# Altium PCB VRef_LP3878_MEZ_0603.PcbDoc
Units mm, origin at the board's own origin, x right, y up, seen from the top; angles counter-clockwise.
Board outline 56 x 38 mm, 2 copper layers (Top Layer, Bottom Layer); 49 components, 25 nets, 162 pads, 36 vias.
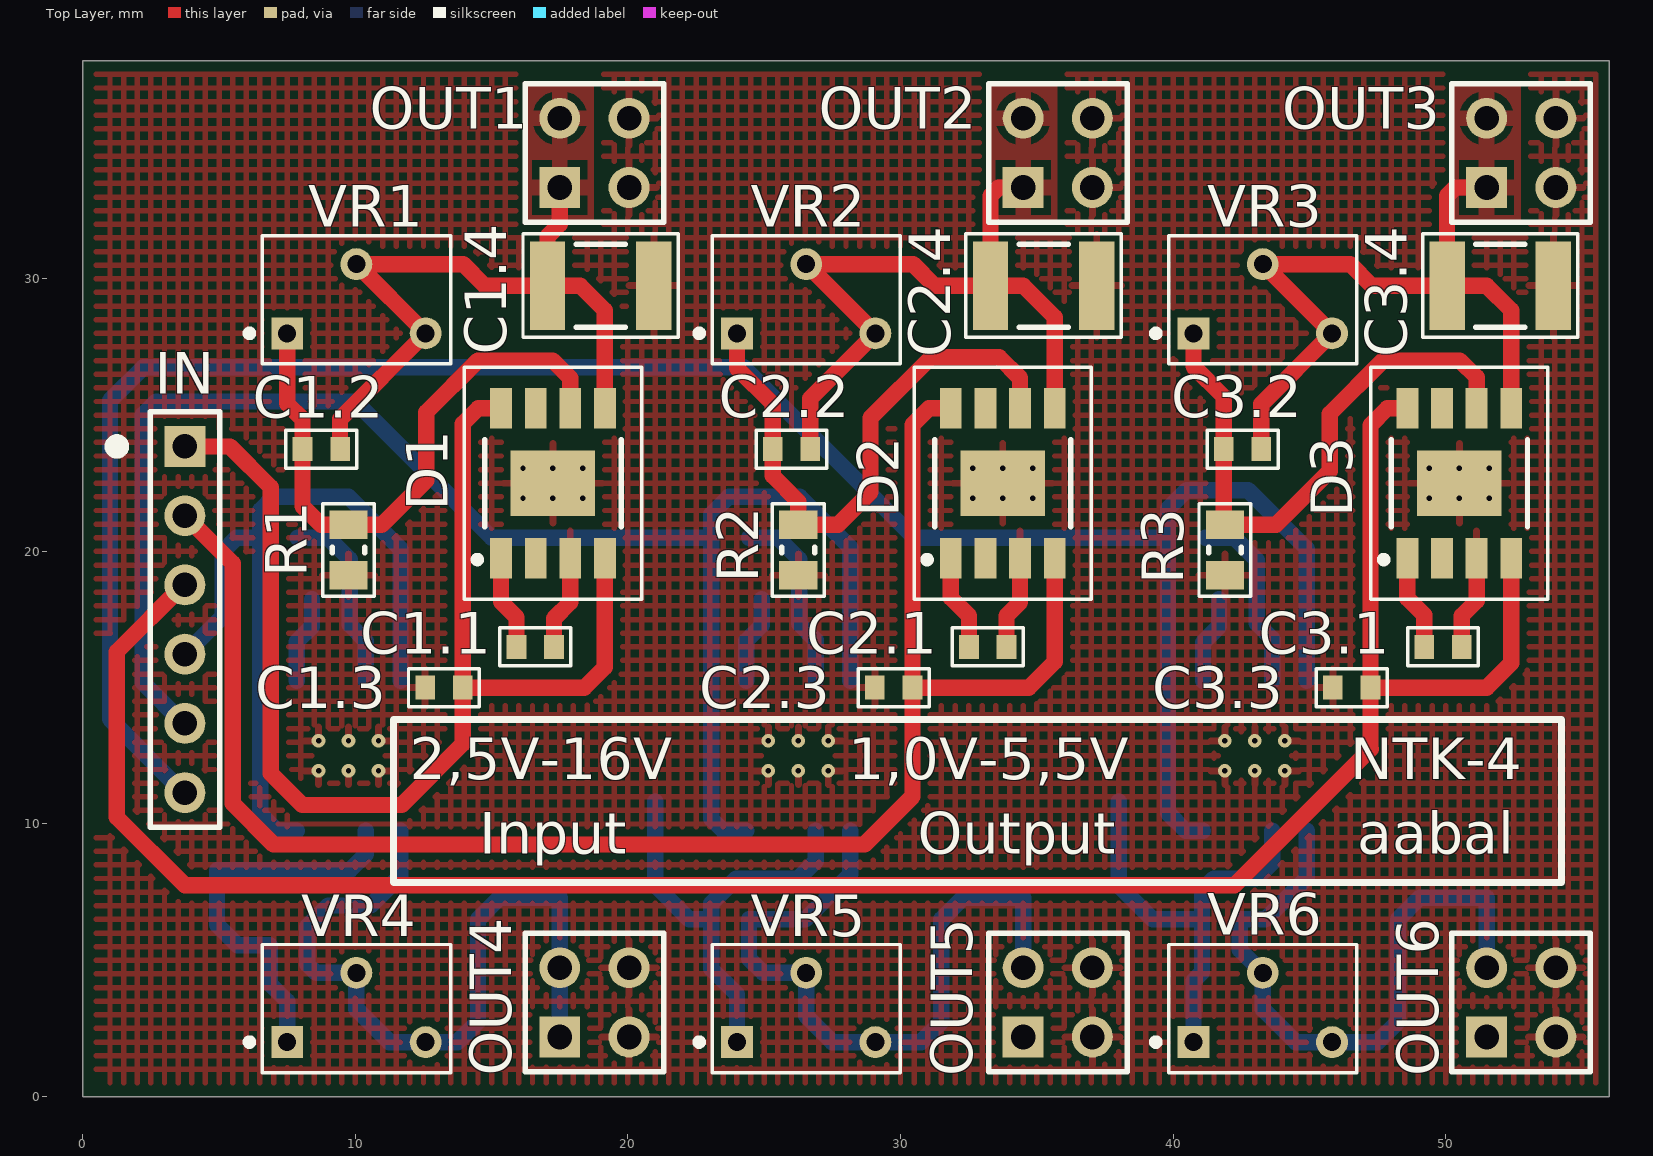
[diagram p0: Top Layer view]
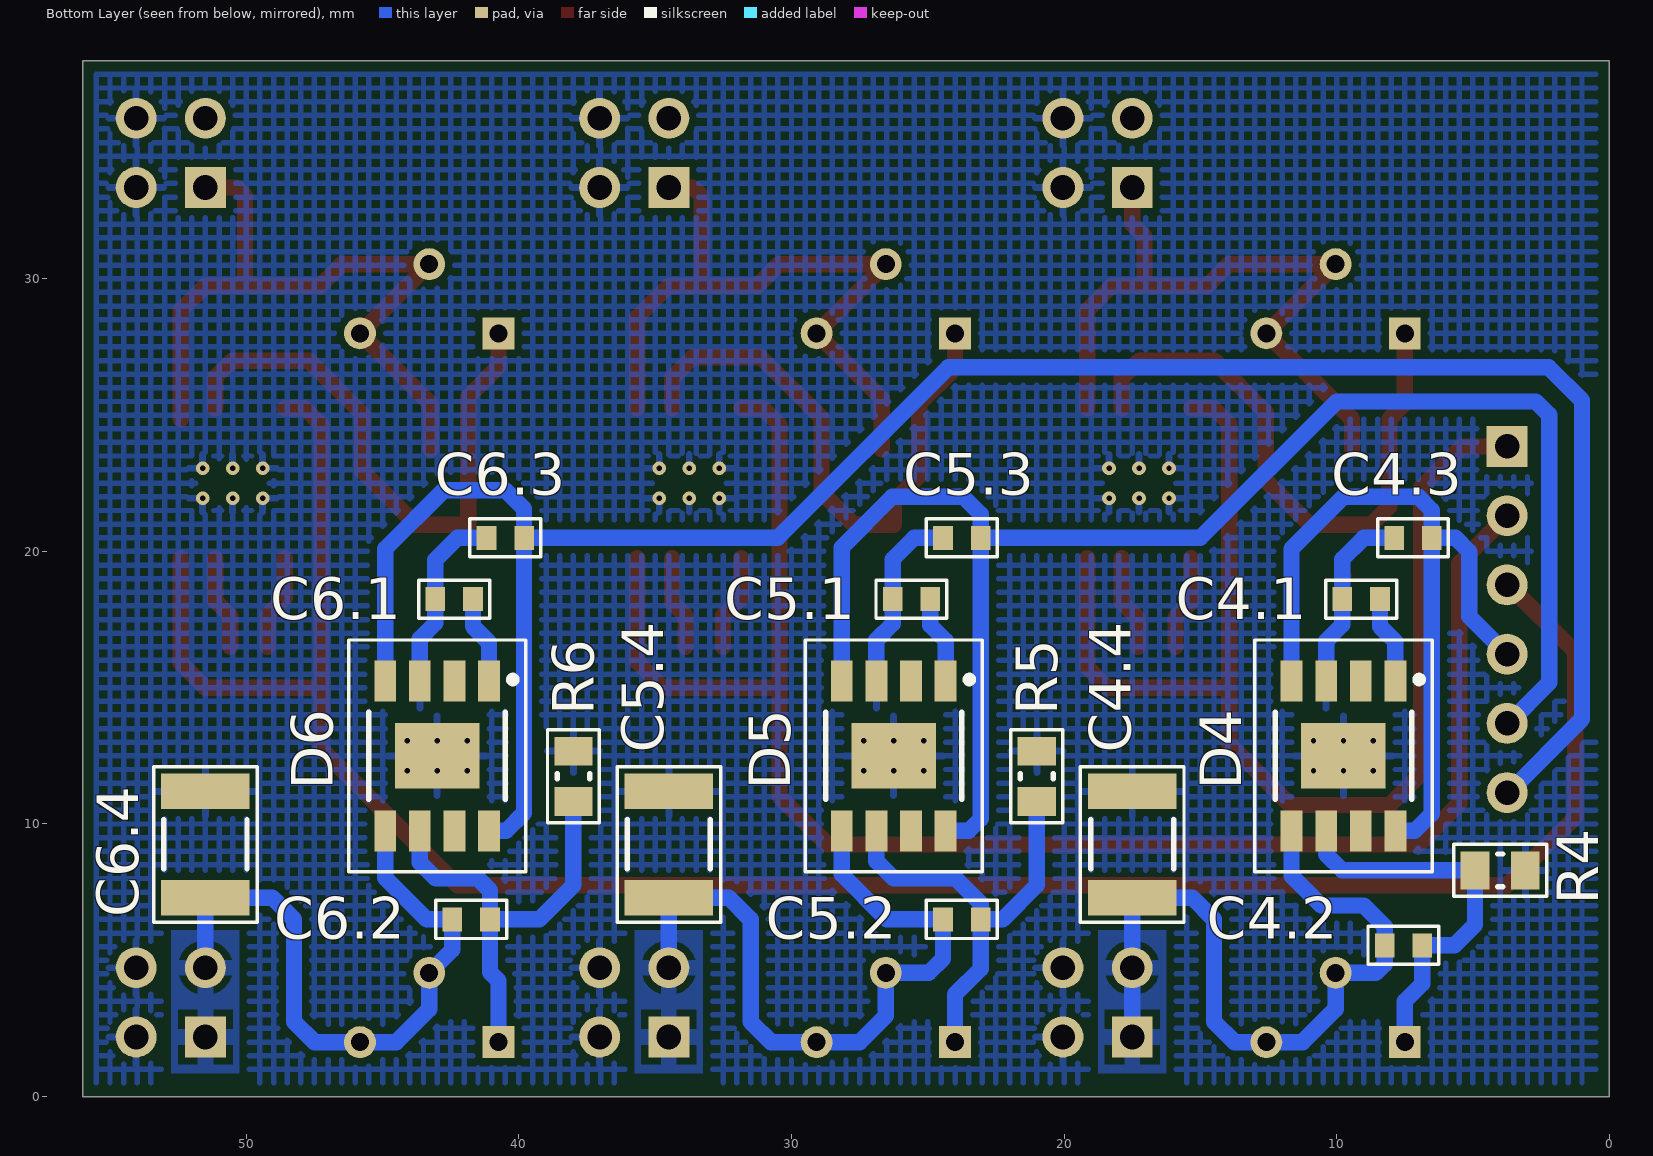
[diagram p1: Bottom Layer view, seen from below]

## Layer stack, top to bottom
Top Solder: solder mask 0.0102, Solder Resist, Dk 3.5
Top Layer: signal copper 0.0356
Dielectric 1: dielectric 0.32, FR-4, Dk 4.8
Bottom Layer: signal copper 0.0356
Bottom Solder: solder mask 0.0102, Solder Resist, Dk 3.5

## Board outline
0,0 56,0 56,38 0,38

## Design rules (kind name [scope] priority, off if disabled: settings)
Clearance [All] p1: gap=0.254 ignorepadtopadclearanceinfootprint=FALSE except(0: Arc-Hole Track-Hole SMDPad-Hole THPad-Hole Via-Hole Fill-Hole Poly-Hole Region-Hole Text-Hole)
PolygonConnect [All] p1: connectstyle=Relief reliefconductorwidth=0.254 reliefentries=4 polygonreliefangle="90 Angle" airgapwidth=0.254
RoutingVias [All] p1: holewidth=0.711 width=1.27 viastyle="Through Hole" minholewidth=0.711 minwidth=1.27 maxholewidth=0.711 maxwidth=1.27
SolderMaskExpansion [All] p1: expansion=0.102
Width [All] p1: maxlimit=0.6 minlimit=0.254 preferedwidth=0.254
30 further rules are at their usual default settings.

## Components (designator, comment, footprint, x,y, rotation, side; value= is the part's Value field where it differs from the comment)
C1.1 "0,01uF" CAP_0603 16.6,16.5 r0 top
C1.2 "C_FF" CAP_0603 8.75,23.75 r180 top
C1.3 "4,7uF" CAP_0603 13.25,15 r0 top
C1.4 "10uF" CAP_1812 19,29.75 r0 top
C2.1 "0,01uF" CAP_0603 33.2,16.5 r0 top
C2.2 "C_FF" CAP_0603 26,23.75 r180 top
C2.3 "4,7uF" CAP_0603 29.75,15 r0 top
C2.4 "10uF" CAP_1812 35.25,29.75 r0 top
C3.1 "0,01uF" CAP_0603 49.9,16.5 r0 top
C3.2 "C_FF" CAP_0603 42.55,23.75 r180 top
C3.3 "4,7uF" CAP_0603 46.55,15 r0 top
C3.4 "10uF" CAP_1812 52,29.75 r0 top
C4.1 "0,01uF" CAP_0603 9.1,18.25 r0 bottom
C4.2 "C_FF" CAP_0603 7.55,5.55 r180 bottom
C4.3 "4,7uF" CAP_0603 7.2,20.5 r180 bottom
C4.4 "10uF" CAP_1812 17.5,9.25 r90 bottom
C5.1 "0,01uF" CAP_0603 25.6,18.25 r0 bottom
C5.2 "C_FF" CAP_0603 23.75,6.5 r180 bottom
C5.3 "4,7uF" CAP_0603 23.75,20.5 r180 bottom
C5.4 "10uF" CAP_1812 34.5,9.25 r90 bottom
C6.1 "0,01uF" CAP_0603 42.375,18.25 r0 bottom
C6.2 "C_FF" CAP_0603 41.75,6.5 r180 bottom
C6.3 "4,7uF" CAP_0603 40.5,20.5 r180 bottom
C6.4 "10uF" CAP_1812 51.5,9.25 r90 bottom
D1 "LP3878MR-ADJ/NOPB" LP3878MR-ADJ/NOPB 17.25,22.5 r90 top
D2 "LP3878MR-ADJ/NOPB" LP3878MR-ADJ/NOPB 33.75,22.5 r90 top
D3 "LP3878MR-ADJ/NOPB" LP3878MR-ADJ/NOPB 50.5,22.5 r90 top
D4 "LP3878MR-ADJ/NOPB" LP3878MR-ADJ/NOPB 9.75,12.5 r270 bottom
D5 "LP3878MR-ADJ/NOPB" LP3878MR-ADJ/NOPB 26.25,12.5 r270 bottom
D6 "LP3878MR-ADJ/NOPB" LP3878MR-ADJ/NOPB 43,12.5 r270 bottom
IN "Header 6" HDR1X6 3.75,23.85 r270 top
OUT1 "Header 2X2" HDR2X2 17.5,33.35 r0 top
OUT2 "Header 2X2" HDR2X2 34.5,33.35 r0 top
OUT3 "Header 2X2" HDR2X2 51.5,33.35 r0 top
OUT4 "Header 2X2" HDR2X2 17.5,2.187 r0 top
OUT5 "Header 2X2" HDR2X2 34.5,2.187 r0 top
OUT6 "Header 2X2" HDR2X2 51.5,2.187 r0 top
R1 "RES" RES_0805 9.75,20.05 r90 top
R2 "RES" RES_0805 26.25,20.05 r90 top
R3 "RES" RES_0805 41.9,20.05 r90 top
R4 "RES" RES_0805 4,8.3 r0 bottom
R5 "RES" RES_0805 21,11.75 r270 bottom
R6 "RES" RES_0805 38,11.75 r270 bottom
VR1 "RES 3266W" "RES 3266W" 7.5,28 r0 top
VR2 "RES 3266W" "RES 3266W" 24,28 r0 top
VR3 "RES 3266W" "RES 3266W" 40.75,28 r0 top
VR4 "RES 3266W" "RES 3266W" 7.5,2 r0 top
VR5 "RES 3266W" "RES 3266W" 24,2 r0 top
VR6 "RES 3266W" "RES 3266W" 40.75,2 r0 top

## Footprints (in the part's own frame and the unit in brackets; to place one, negate y for a bottom-side part, rotate by r counter-clockwise, add the part's x,y. Pads: shape width x height; smd on the part's side, far side on the other; paste and mask are expansions set on the pad)
CAP_0603 [mm]
  rect 0.72x0.88 smd: 1(-0.69,0) 2(0.69,0)
  silkscreen extent -1.3,-0.7 1.3,0.7, body extent -0.8,-0.4 0.8,0.4, height 0.9
CAP_1812 [mm]
  rect 1.3x3.25 smd: 1(-1.95,0) 2(1.95,0)
  silkscreen extent -2.85,-1.9 2.85,1.9, body extent -2.25,-1.6 2.25,1.6, height 2
HDR1X6 [mm] "Connector; Header; 6 Position"
  rect 1.5x1.5 hole 0.9: 1(0,0)
  round 1.5 hole 0.9: 2(2.54,0) 3(5.08,0) 4(7.62,0) 5(10.16,0) 6(12.7,0)
  silkscreen extent -1.27,-1.27 13.97,1.27
HDR2X2 [mm] "Connector; Header; 2x2 Position"
  rect 1.5x1.5 hole 0.9: 1(0,0)
  round 1.5 hole 0.9: 2(0,2.54) 3(2.54,0) 4(2.54,2.54)
  silkscreen extent -1.27,-1.27 3.81,3.81
LP3878MR-ADJ/NOPB [mm] "SOIC, 8-Leads, Body 4,90x3,90mm, Pitch 1,27mm, Thermal Pad 3,10x2,41mm, IPC Medium Density"
  rect 1.5x0.8 smd: 1(-2.75,1.905) 2(-2.75,0.635) 3(-2.75,-0.635) 4(-2.75,-1.905) 5(2.75,-1.905) 6(2.75,-0.635) 7(2.75,0.635) 8(2.75,1.905)
  rect 2.41x3.1 smd: 9(0,0)
  silkscreen extent -4.25,-3.25 4.25,3.25, body extent -2,-2.5 2,2.5, height 1.68
"RES 3266W" [mm]
  rect 1.168x1.168 hole 0.66: 1(0,0)
  round 1.168 hole 0.66: 2(2.54,2.54) 3(5.08,0)
  silkscreen extent -1.48,-1.12 5.99,3.58, body extent -0.81,-1.02 5.9,3.48, height 8.77
RES_0805 [mm]
  rect 1.05x1.4 smd: 1(-0.925,0) 2(0.925,0)
  silkscreen extent -1.7,-0.95 1.7,0.95, body extent -1.1,-0.7 1.1,0.7, height 1

## Part data
C1.1 C1.2 C1.3 C1.4 C2.1 C2.2 C2.3 C2.4 C3.1 C3.2 C3.3 C3.4 C4.1 C4.2 C4.3 C4.4 C5.1 C5.2 C5.3 C5.4 C6.1 C6.2 C6.3 C6.4: library part CAP
IN: "Header, 6-Pin", LatestRevisionDate=17-Jul-2002, LatestRevisionNote="Re-released for DXP Platform.", Publisher="Altium Limited"
OUT1 OUT2 OUT3 OUT4 OUT5 OUT6: "Header, 2-Pin, Dual row", LatestRevisionDate=17-Jul-2002, LatestRevisionNote="Re-released for DXP Platform.", Publisher="Altium Limited"

## Via types
v1: diameter 0.5, hole 0.2, Top Layer to Bottom Layer, 36 vias

## Nets (pads, with @x,y where several pads share a name; then routed paths per layer and width w, separated by ;. In a path a pad name is that pad's centre, name@x,y a point inside that pad or via, vN(x,y) a via of type N, cw(c..) or ccw(c..) an arc to the next point about the centre after c; other vN are vias at no path point)
GND: C1.1.2 C1.3.1 C1.4.2 C2.1.2 C2.3.1 C2.4.2 C3.1.2 C3.3.1 C3.4.2 C4.1.2 C4.3.1 C4.4.2 C5.1.2 C5.3.1 C5.4.2 C6.1.2 C6.3.1 C6.4.2 D1.3 D1.9 D2.3 D2.9 D3.3 D3.9 D4.3 D4.9 D5.3 D5.9 D6.3 D6.9 OUT1.3 OUT1.4 OUT2.3 OUT2.4 OUT3.3 OUT3.4 OUT4.3 OUT4.4 OUT5.3 OUT5.4 OUT6.3 OUT6.4 R1.1 R2.1 R3.1 R4.1 R5.1 R6.1 | length 31.1
  Top Layer w0.6: C1.1.2 17.29,17.54 17.885,18.135 D1.3 ; C2.1.2 33.89,17.64 34.385,18.135 D2.3 ; C3.1.2 50.59,17.645 51.135,18.19 D3.3
  Bottom Layer w0.6: C4.3.1 9,20.5 9.79,19.71 C4.1.2 9.79,17.31 10.385,16.715 D4.3 ; C5.3.1 25.5,20.5 26.29,19.71 C5.1.2 26.29,17.346 26.885,16.751 D5.3 ; C6.3.1 42.25,20.5 43.065,19.685 C6.1.2 43.065,17.36 43.635,16.79 D6.3
  other v1: 8.65,11.95 9.75,11.95 10.85,11.95 25.15,11.95 26.25,11.95 27.35,11.95 41.9,11.95 43,11.95 44.1,11.95 8.65,13.05 9.75,13.05 10.85,13.05 25.15,13.05 26.25,13.05 27.35,13.05 41.9,13.05 43,13.05 44.1,13.05 16.15,21.95 17.25,21.95 18.35,21.95 32.65,21.95 33.75,21.95 34.85,21.95 49.4,21.95 50.5,21.95 51.6,21.95 16.15,23.05 17.25,23.05 18.35,23.05 32.65,23.05 33.75,23.05 34.85,23.05 49.4,23.05 50.5,23.05 51.6,23.05
IN1: C1.3.2 D1.4 D1.8 IN.1 | length 45.7
  Top Layer w0.6: IN.1@3.7,23.85 IN.1 5.4,23.85 6.9,22.35 6.9,11.85 8.052,10.698 11.698,10.698 13.94,12.94 C1.3.2 ; D1.8 14.507,25.25 13.94,24.683 C1.3.2 ; D1.4 19.155,15.755 18.4,15 C1.3.2
IN2: C2.3.2 D2.4 D2.8 IN.2 | length 62.3
  Top Layer w0.6: IN.2 5.5,19.56 5.5,10.75 7,9.25 28.682,9.25 30.44,11.008 C2.3.2 ; D2.8 31.042,25.25 30.44,24.647 C2.3.2 ; D2.4 35.655,15.955 34.7,15 C2.3.2
IN3: C3.3.2 D3.4 D3.8 IN.3 | length 81.5
  Top Layer w0.6: IN.3@3.7,18.77 1.25,16.32 1.25,10.25 3.75,7.75 42.25,7.75 47.25,12.75 47.24,12.76 C3.3.2 ; D3.8 47.857,25.25 47.24,24.633 C3.3.2 ; D3.4 52.405,15.905 51.5,15 C3.3.2
IN4: C4.3.2 D4.4 D4.8 IN.4 | length 29.6
  Bottom Layer w0.6: IN.4 5.131,17.611 5.131,19.988 5.642,20.5 C4.3.2 ; D4.8 7.139,9.75 6.51,10.38 C4.3.2 ; D4.4 11.655,20.095 9.75,22 7,22 6.51,21.51 C4.3.2
IN5: C5.3.2 D5.4 D5.8 IN.5 | length 58.8
  Bottom Layer w0.6: IN.5 3.7,13.69 2.2,15.19 2.2,25.008 2.692,25.5 10,25.5 15,20.5 C5.3.2 ; D5.8 23.5,9.75 23.06,10.19 C5.3.2 ; D5.4 28.155,20.145 26.3,22 23.7,22 23.06,21.36 C5.3.2
IN6: C6.3.2 D6.4 D6.8 IN.6 | length 81.2
  Bottom Layer w0.6: IN.6@3.7,11.15 1,13.85 1,25.535 2.215,26.75 24.25,26.75 30.5,20.5 C6.3.2 ; D6.8 40.464,9.75 39.81,10.404 C6.3.2 ; D6.4 44.905,20.095 42.75,22.25 40.5,22.25 39.81,21.56 C6.3.2
NetC1.1_1: C1.1.1 D1.1 | length 3.5
  Top Layer w0.6: D1.1 15.345,18.155 15.91,17.59 C1.1.1
NetC1.2_2: C1.2.2 D1.6 R1.2 VR1.1 | length 22
  Top Layer w0.6: VR1.1 7.5,25.417 8.06,24.857 C1.2.2 8.06,21.657 8.742,20.975 R1.2 10.975,20.975 12.6,22.6 12.6,25.1 14.5,27 17.245,27 17.885,26.36 D1.6
NetC2.1_1: C2.1.1 D2.1 | length 3.5
  Top Layer w0.6: D2.1 31.845,18.305 32.51,17.64 C2.1.1
NetC2.2_2: C2.2.2 D2.6 R2.2 VR2.1 | length 21.7
  Top Layer w0.6: VR2.1 24,26.722 25.31,25.413 C2.2.2 25.31,22.771 26.25,21.831 R2.2 27.707,20.975 28.9,22.168 28.9,24.9 31.126,27.126 33.624,27.126 34.385,26.365 D2.6
NetC3.1_1: C3.1.1 D3.1 | length 3.5
  Top Layer w0.6: D3.1 48.595,18.28 49.21,17.665 C3.1.1
NetC3.2_2: C3.2.2 D3.6 R3.2 VR3.1 | length 21.9
  Top Layer w0.6: VR3.1 40.75,26.787 41.86,25.677 C3.2.2 41.86,21.015 R3.2 43.775,20.975 45.75,22.95 45.75,25.05 47.7,27 50.519,27 51.135,26.384 D3.6
NetC4.1_1: C4.1.1 D4.1 | length 3.2
  Bottom Layer w0.6: D4.1 7.845,16.683 8.41,17.248 C4.1.1
NetC4.2_2: C4.2.2 D4.6 R4.2 VR4.1 | length 14.6
  Bottom Layer w0.6: VR4.1 7.5,3.5 6.86,4.14 C4.2.2 5.675,5.55 4.925,6.3 R4.2 9.8,8.3 10.385,8.885 D4.6
NetC5.1_1: C5.1.1 D5.1 | length 3.2
  Bottom Layer w0.6: D5.1 24.345,16.724 24.91,17.289 C5.1.1
NetC5.2_2: C5.2.2 D5.6 R5.2 VR5.1 | length 16.7
  Bottom Layer w0.6: R5.2 21,7.75 22.25,6.5 C5.2.2 ; VR5.1 24,3.75 23.06,4.69 C5.2.2 ; D5.6 26.885,8.635 26.25,8 23.978,8 23.06,7.082 C5.2.2
NetC6.1_1: C6.1.1 D6.1 | length 3.2
  Bottom Layer w0.6: D6.1 41.095,16.659 41.685,17.249 C6.1.1
NetC6.2_2: C6.2.2 D6.6 R6.2 VR6.1 | length 16.5
  Bottom Layer w0.6: R6.2 38,7.75 39.25,6.5 C6.2.2 ; VR6.1 40.75,4.25 41.06,4.56 C6.2.2 ; D6.6 43.635,8.585 43.05,8 41.5,8 41.06,7.56 C6.2.2
OUT1: C1.2.1 C1.4.1 D1.5 OUT1.1 OUT1.2 VR1.2 VR1.3 | length 26.3
  Top Layer w0.6: C1.2.1 9.44,24.86 VR1.3 VR1.2 13.96,30.54 14.75,29.75 C1.4.1 ; OUT1.1 17.5,32 17.05,31.55 C1.4.1 ; D1.5 19.155,28.85 18.255,29.75 C1.4.1
OUT2: C2.2.1 C2.4.1 D2.5 OUT2.1 OUT2.2 VR2.2 VR2.3 | length 26.7
  Top Layer w0.6: C2.2.1 26.69,25.61 VR2.3 VR2.2 30.46,30.54 31.25,29.75 C2.4.1 ; OUT2.1 33.6,33.35 33.3,33.05 C2.4.1 ; D2.5 35.655,28.595 34.5,29.75 C2.4.1
OUT3: C3.2.1 C3.4.1 D3.5 OUT3.1 OUT3.2 VR3.2 VR3.3 | length 27.6
  Top Layer w0.6: C3.2.1 43.24,25.41 VR3.3 VR3.2 46.5,30.54 47.29,29.75 C3.4.1 ; OUT3.1 50.35,33.35 50.05,33.05 C3.4.1 ; D3.5@52.405,24.845 D3.5 52.405,28.845 51.5,29.75 C3.4.1
OUT4: C4.2.1 C4.4.1 D4.5 OUT4.1 OUT4.2 VR4.2 VR4.3 | length 27.9
  Bottom Layer w0.6: D4.5 11.655,8.098 10.566,7.009 9.009,7.009 8.24,6.24 C4.2.1 8.24,4.86 8.56,4.54 VR4.2 10.04,3.21 11.25,2 VR4.3 13.75,2 14.5,2.75 14.5,6.5 15.3,7.3 C4.4.1 OUT4.2 OUT4.1
OUT5: C5.2.1 C5.4.1 D5.5 OUT5.1 OUT5.2 VR5.2 VR5.3 | length 26.7
  Bottom Layer w0.6: D5.5 28.155,8.155 26.5,6.5 C5.2.1 24.44,5.06 24.96,4.54 VR5.2 26.54,2.96 27.5,2 VR5.3 30.75,2 31.5,2.75 31.5,6.5 32.3,7.3 C5.4.1 OUT5.2
OUT6: C6.2.1 C6.4.1 D6.5 OUT6.1 OUT6.2 VR6.2 VR6.3 | length 24.1
  Bottom Layer w0.6: D6.5 44.905,8.023 43.382,6.5 C6.2.1 42.44,5.39 VR6.2 43.29,3.21 44.5,2 VR6.3 47.5,2 48.25,2.75 48.25,6.5 49.05,7.3 C6.4.1 OUT6.2
pads on no net: D1.2 D1.7 D2.2 D2.7 D3.2 D3.7 D4.2 D4.7 D5.2 D5.7 D6.2 D6.7

## Polygon pours and split planes (outlines as drawn)
GND on Bottom Layer "GND_L02_P152" (hatched 90Degree grid 0.5 track 0.2, remove dead copper, pour order 152): 0.5,0.5 0.5,37.5 55.5,37.5 55.5,0.5
OUT5 on Bottom Layer "OUT5_L02_P146" (solid, remove dead copper, pour order 146): 35.75,6.1 35.75,0.85 33.25,0.85 33.25,6.1
no net on Bottom Layer "NONET_L02_P144" (solid, remove dead copper, pour order 144): 35.75,6
OUT6 on Bottom Layer "OUT6_L02_P142" (solid, remove dead copper, pour order 142): 52.75,6.1 52.75,0.85 50.25,0.85 50.25,6.1
OUT4 on Bottom Layer "OUT4_L02_P140" (solid, remove dead copper, pour order 140): 18.75,6.1 18.75,0.85 16.25,0.85 16.25,6.1
no net on Bottom Layer "NONET_L02_P138" (solid, remove dead copper, pour order 138): 33.25,6
no net on Bottom Layer "NONET_L02_P136" (solid, remove dead copper, pour order 136): 35.75,6
no net on Bottom Layer "NONET_L02_P094" (hatched 90Degree grid 0.4 track 0.2, remove dead copper, pour order 94): 0.25,-1.25
GND on Bottom Layer "GND_L02_P066" (hatched 90Degree grid 0.6 track 0.2, remove dead copper, pour order 66): 0.25,36.25
GND on Bottom Layer "GND_L02_P064" (hatched 90Degree grid 0.6 track 0.2, remove dead copper, pour order 64): -1,34.5
GND on Bottom Layer "GND_L02_P062" (hatched 90Degree grid 0.6 track 0.2, remove dead copper, pour order 62): 0.25,36.25
GND on Bottom Layer "GND_L02_P026" (hatched 90Degree grid 0.6 track 0.2, remove dead copper, pour order 26): 0.25,34.25
GND on Bottom Layer "GND_L02_P006" (hatched 90Degree grid 0.6 track 0.2, remove dead copper, pour order 6): 0.25,0.75
GND on Bottom Layer "GND_L02_P002" (hatched 90Degree grid 0.6 track 0.2, remove dead copper, pour order 2): 1,33.5
GND on Top Layer "GND_L01_P154" (hatched 90Degree grid 0.5 track 0.2, remove dead copper, pour order 154): 0.5,0.5 0.5,37.5 55.5,37.5 55.5,0.5
OUT3 on Top Layer "OUT3_L01_P134" (solid, remove dead copper, pour order 134): 52.75,37.25 52.75,32 50.25,32 50.25,37.25
OUT2 on Top Layer "OUT2_L01_P132" (solid, remove dead copper, pour order 132): 35.75,37.25 35.75,32 33.25,32 33.25,37.25
no net on Top Layer "NONET_L01_P130" (hatched 90Degree grid 0.5 track 0.2, remove dead copper, pour order 130): 35.75,37.25
OUT1 on Top Layer "OUT1_L01_P128" (solid, remove dead copper, pour order 128): 18.75,37.25 18.75,32 16.25,32 16.25,37.25
GND on Top Layer "GND_L01_P046" (hatched 90Degree grid 0.6 track 0.2, remove dead copper, pour order 46): 0.5,36.25
GND on Top Layer "GND_L01_P032" (hatched 90Degree grid 0.6 track 0.2, remove dead copper, pour order 32): 59.75,34.25

## Other copper
Top Layer:
  pour cut-out: 49.889,31.5 49.889,38 53.111,38 53.111,31.5
  pour cut-out: 32.889,31.5 32.889,38 36.111,38 36.111,31.5
  pour cut-out: 15.889,31.5 15.889,38 19.111,38 19.111,31.5
  pour cut-out: 31,19 31,15.5 34.5,15.5 35.25,16.25 35.25,19
  pour cut-out: 14.5,19 14.5,15.5 18,15.5 18.75,16.25 18.75,19
  pour cut-out: 47.75,19 47.75,15.5 51.5,15.5 52,16 52,19
Bottom Layer:
  pour cut-out: 49.889,0 49.889,6.5 53.111,6.5 53.111,0
  pour cut-out: 32.889,0 32.889,6.5 36.111,6.5 36.111,0
  pour cut-out: 15.889,0 15.889,6.5 19.111,6.5 19.111,0
  pour cut-out: 16.25,6.1
  pour cut-out: 16.25,0
  pour cut-out: 42.5,3
  pour cut-out: 42,3.5
  pour cut-out: 9.75,2.75 7.75,2.75 7.75,4.75 9.75,4.75
  pour cut-out: 26.25,2.75 24.25,2.75 24.25,4.75 26.25,4.75
  pour cut-out: 43,2.75 41,2.75 41,4.75 43,4.75
  pour cut-out: 41.404,2.938
  pour cut-out: 44.6,16.1 44.6,19.85 42.85,21.6 40.6,21.6 40.35,21.35 40.35,16.1
  pour cut-out: 27.91,16 27.91,19.75 26.16,21.5 23.91,21.5 23.66,21.25 23.66,16
  pour cut-out: 11.25,16 11.25,19.75 9.5,21.5 7.25,21.5 7,21.25 7,16

## Silkscreen, mask and mechanical layers (free items; w line width, h text height)
Top Overlay:
  circle w0.5: c1.25,23.85 r0.2
  lines w0.254: 11.4,7.857 54.25,7.857 54.25,13.831 11.4,13.831 11.4,7.857
  text "2,5V-16V" at 12,11.65 h1.52
  text "1,0V-5,5V" at 28.088,11.65 h1.52
  text "NTK-4" at 46.5,11.65 h1.52
  text "Input" at 14.539,8.9 h1.52
  text "Output" at 30.627,8.9 h1.52
  text "aabal" at 46.754,8.9 h1.52
Mechanical 1:
  the board outline again, w0.254